# Altium PCB PCB_TUD-EHC-CrankModule_2.pcbdoc
Units mm, origin at the board's own origin, x right, y up, seen from the top; angles counter-clockwise.
Board outline 74.31 x 35.93 mm, 2 copper layers (Top Layer, Bottom Layer); 33 components, 22 nets, 89 pads, 27 vias.
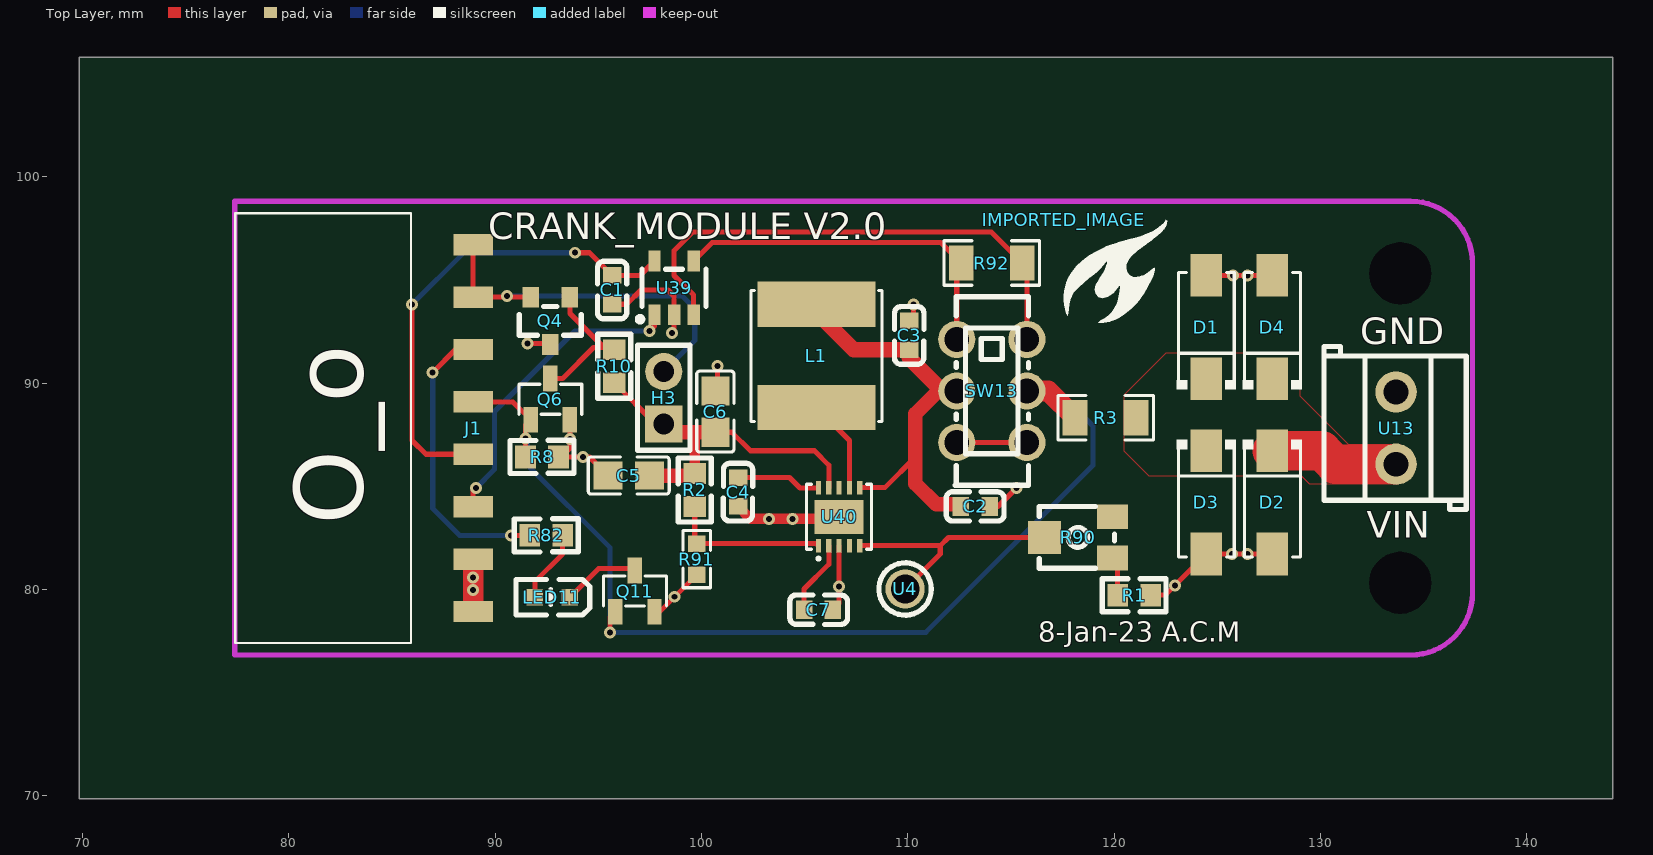
[diagram p0: Top Layer view]
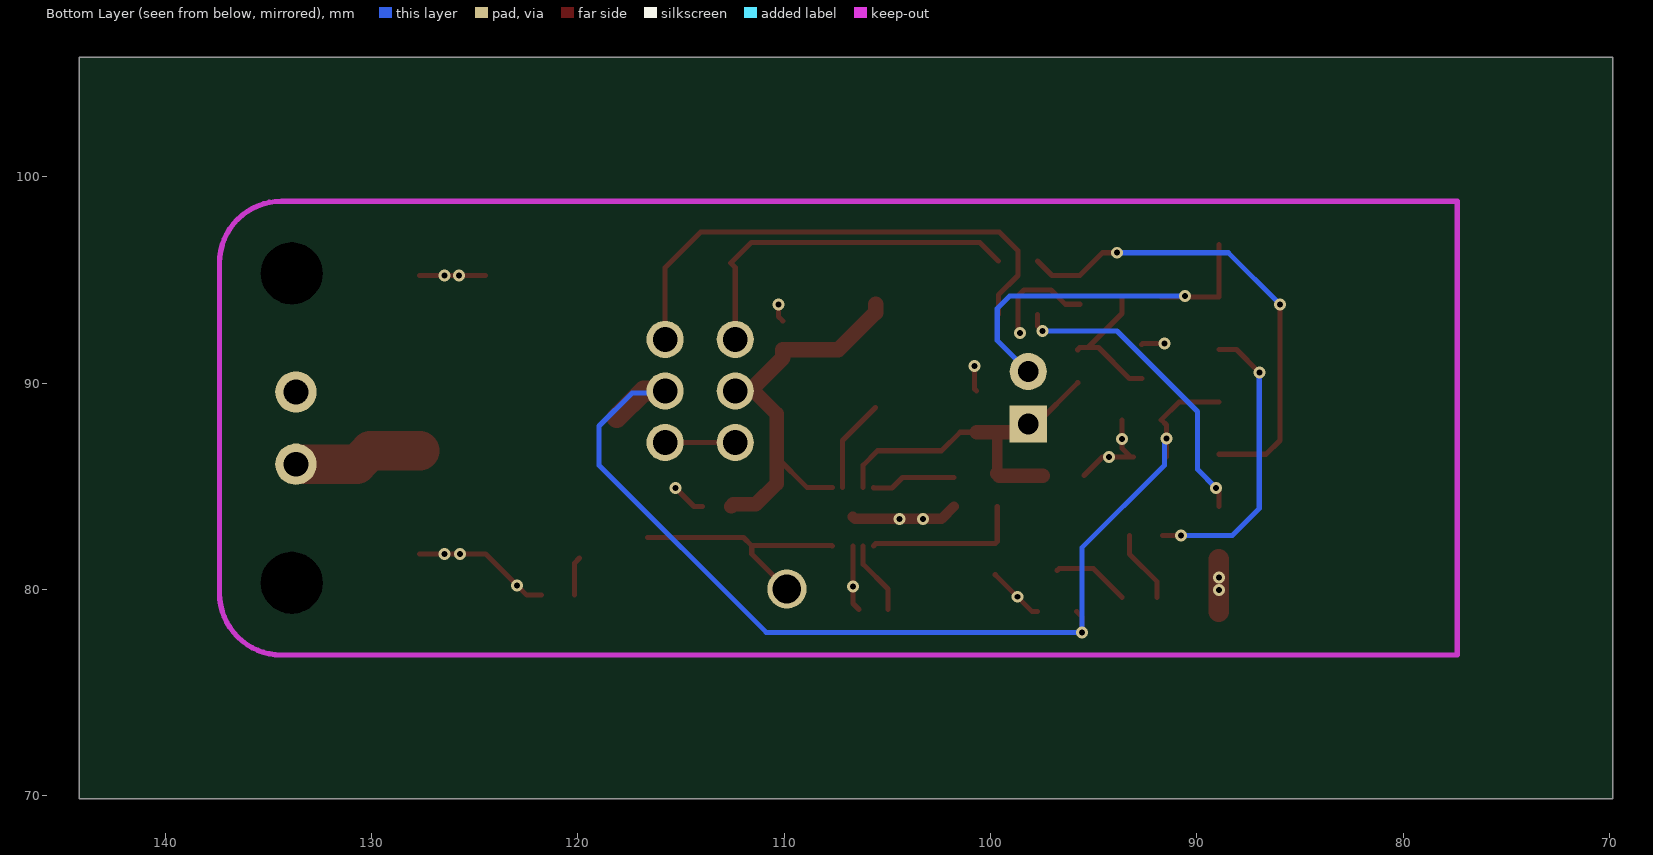
[diagram p1: Bottom Layer view, seen from below]

## Layer stack, top to bottom
Top Layer: signal copper (thickness not stored)
Dielectric: dielectric 0.32, FR-4, Dk 4.8
Bottom Layer: signal copper (thickness not stored)

## Board outline
144.162,69.85 69.85,69.85 69.85,105.78 144.162,105.78
cut-out: 135.373,95.315 ccw(c133.873,95.315) 132.373,95.315 ccw(c133.873,95.315)
cut-out: 135.373,80.315 ccw(c133.873,80.315) 132.373,80.315 ccw(c133.873,80.315)

## Components (designator, comment, footprint, x,y, rotation, side; value= is the part's Value field where it differs from the comment)
C1 "100nF" C0603 95.673,94.515 r90 top
C2 "CL10A106MA8NRNC" C0603 113.273,84.015 r0 top
C3 "CL10A106MA8NRNC" C0603 110.073,92.315 r90 top
C4 "CL10A105KB8NNNC" C0603 101.773,84.715 r90 top
C5 "CL21A226MAQNNNE_C45783" C0805 96.473,85.515 r0 top
C6 "CL21A226MAQNNNE_C45783" C0805 100.673,88.615 r270 top
C7 "CL10A106MA8NRNC" C0603 105.673,79.015 r180 top
D1 "SS54" SMA_L4.4-W2.8-LS5.4-R-RD 124.473,92.715 r90 top
D2 "SS54" SMA_L4.4-W2.8-LS5.4-R-RD 127.673,84.215 r270 top
D3 "SS54" SMA_L4.4-W2.8-LS5.4-R-RD 124.473,84.215 r270 top
D4 "SS54" SMA_L4.4-W2.8-LS5.4-R-RD 127.673,92.715 r90 top
H3 "OUT bypass" HDR-TH_2P-P2.54-V-M-1 98.173,89.285 r90 top
IMPORTED_IMAGE "IMPORTED_IMAGE" IMPORTED_IMAGE 117.573,97.915 r0 top
J1 "SMH-108-02-G-S-TR" SMH-108-02-XX-S-TR 88.93,87.815 r270 top
L1 "CKCS6028-10uH/M" IND-SMD_L6.0-W6.0 105.573,91.315 r90 top
LED11 "KT-0603R" LED0603-R-RD 92.773,79.615 r180 top
Q4 "AO3401A" SOT-23_L2.9-W1.3-P1.90-LS2.4-BR 92.673,93.015 r90 top
Q6 "SI2302" SOT-23-3_L2.9-W1.3-P1.90-LS2.4-BR 92.673,89.215 r270 top
Q11 "AO3400A" SOT-23-3_L2.9-W1.3-P1.90-LS2.4-BR 96.773,79.915 r270 top
R1 "1kΩ" R0603#1 120.973,79.715 r180 top
R2 "3MΩ" R0603#1 99.673,84.815 r270 top
R3 "1206W3F500MT5E_C127691" R1206 119.594,88.315 r180 top
R8 "3MΩ" R0603#1 92.273,86.415 r0 top
R10 "3MΩ" R0603#1 95.773,90.815 r270 top
R82 "1kΩ" R0603#1 92.473,82.615 r180 top
R90 "VG039NCHXTB204" RES-ADJ-SMD_VG039NCH 118.273,82.515 r0 top
R91 "0603WAF7503T5E" R0603#2 99.773,81.462 r90 top
R92 "1206W3F500MT5E_C127691" R1206 114.073,95.815 r0 top
SW13 "K3-2235D-F1" SW-TH_K3-2235D-F1 114.073,89.615 r270 top
U4 "5001" TEST-TH_BD2.54-P1.39 109.873,80.015 r0 top
U13 "KF350-3.5-2P" CONN-TH_P3.50_KF350-3.5-2P 133.673,87.815 r90 top
U39 "INA180A3IDBVR" SOT-23-5_L3.0-W1.7-P0.95-LS2.8-BR 98.673,94.615 r270 top
U40 "LTC3105EDD#PBF" DFN-10_L3.0-W3.0-P0.50-BL-EP_LTC3105EDD 106.673,83.515 r0 top

## Footprints (in the part's own frame and the unit in brackets; to place one, negate y for a bottom-side part, rotate by r counter-clockwise, add the part's x,y. Pads: shape width x height; smd on the part's side, far side on the other; paste and mask are expansions set on the pad)
C0603 [mm]
  rect 0.8x0.9 smd paste+0 mask+0.051: 1(-0.7,0) 2(0.7,0)
  silkscreen extent -1.41,-0.71 1.39,0.72
C0805 [mm]
  rect 1.41x1.35 smd paste-100 mask+0.051: 1(-1,0) 2(1,0)
  silkscreen extent -1.96,-0.9 1.96,0.9
CONN-TH_P3.50_KF350-3.5-2P [mm]
  round 2 hole 1.2 paste+0 mask+0.051: 1(-1.75,0) 2(1.75,0)
  silkscreen extent -3.95,-3.4 3.95,3.5
DFN-10_L3.0-W3.0-P0.50-BL-EP_LTC3105EDD [mm]
  rect 0.25x0.65 smd paste+0 mask+0.051: 1(-1,-1.411) 2(-0.5,-1.411) 3(0,-1.411) 4(0.5,-1.411) 5(1,-1.411) 6(1,1.411) 7(0.5,1.411) 8(0,1.411) 9(-0.5,1.411) 10(-1,1.411)
  rect 2.38x1.65 smd paste+0 mask+0.051: 11(0,0)
  silkscreen extent -1.58,-2.1 1.58,1.58
HDR-TH_2P-P2.54-V-M-1 [mm]
  rect 1.8x1.8 hole 1 paste+0 mask+0.051: 1(-1.27,0)
  round 1.8 hole 1 paste+0 mask+0.051: 2(1.27,0)
  silkscreen extent -2.54,-1.27 2.54,1.27
IMPORTED_IMAGE [mm]
  silkscreen extent 0,-5 5,0
IND-SMD_L6.0-W6.0 [mm]
  rect 2.2x5.72 smd paste+0 mask+0.051: 1(-2.5,0) 2(2.5,0)
  silkscreen extent -3.18,-3.18 3.18,3.18
LED0603-R-RD [mm]
  rect 0.8x0.8 smd paste+0 mask+0.051: 1(0.851,0) 2(-0.851,0)
  silkscreen extent -1.82,-0.86 1.77,0.86
R0603#1 [mm]
  rect 1x1.1 smd paste+0 mask+0.051: 1(-0.8,0) 2(0.8,0)
  silkscreen extent -1.55,-0.8 1.55,0.81
R0603#2 [mm]
  rect 0.806x0.864 smd paste-100 mask+0.051: 1(-0.753,0) 2(0.753,0)
  silkscreen extent -1.39,-0.66 1.39,0.66
R1206 [mm]
  rect 1.208x1.701 smd paste-100 mask+0.051: 1(-1.479,0) 2(1.479,0)
  silkscreen extent -2.31,-1.08 2.31,1.08
RES-ADJ-SMD_VG039NCH [mm]
  rect 1.5x1.2 smd paste+0 mask+0.051: 1(1.65,-1) 3(1.65,1)
  rect 1.6x1.6 smd paste+0 mask+0.051: 2(-1.65,0)
  silkscreen extent -1.9,-1.5 1.75,1.5
SMA_L4.4-W2.8-LS5.4-R-RD [mm]
  rect 2.063x1.539 smd paste+0 mask+0.051: 1(2.504,0) 2(-2.504,0)
  silkscreen extent -3.03,-1.43 2.65,1.43
SMH-108-02-XX-S-TR [mm]
  rect 1.04x1.91 smd paste+0 mask+0.051: 1(-8.89,0) 2(-6.35,0) 3(-3.81,0) 4(-1.27,0) 5(1.27,0) 6(3.81,0) 7(6.35,0) 8(8.89,0)
  silkscreen extent -10.42,-11.53 10.42,-3.02
SOT-23-3_L2.9-W1.3-P1.90-LS2.4-BR [mm]
  rect 1.25x0.7 smd paste+0 mask+0.051: 1(1,-0.95) 2(1,0.95) 3(-1,0)
  silkscreen extent -0.73,-1.53 0.73,1.53
SOT-23-5_L3.0-W1.7-P0.95-LS2.8-BR [mm]
  rect 1x0.6 smd paste+0 mask+0.051: 1(1.3,-0.95) 2(1.3,0) 3(1.3,0.95) 4(-1.3,0.95) 5(-1.3,-0.95)
  silkscreen extent -0.9,-1.78 1.65,1.55
SOT-23_L2.9-W1.3-P1.90-LS2.4-BR [mm]
  rect 1x0.8 smd paste+0 mask+0.051: 1(1.15,-0.95) 2(1.15,0.95) 3(-1.15,0)
  silkscreen extent -0.7,-1.5 0.7,1.5
SW-TH_K3-2235D-F1 [mm]
  round 1.8 hole 1.2 paste+0 mask+0.051: 1(-2.5,1.7) 2(0,1.7) 3(2.5,1.7) 4(-2.5,-1.7) 5(0,-1.7) 6(2.5,-1.7)
  silkscreen extent -4.57,-1.78 4.57,1.78
TEST-TH_BD2.54-P1.39 [mm]
  round 1.9 hole 1.39 paste+0 mask+0.051: 1(0,0)
  silkscreen extent -1.27,-1.27 1.27,1.27

## Via types
v1: diameter 0.58, hole 0.29, Top Layer to Bottom Layer, 27 vias

## Nets (pads, with @x,y where several pads share a name; then routed paths per layer and width w, separated by ;. In a path a pad name is that pad's centre, name@x,y a point inside that pad or via, vN(x,y) a via of type N, cw(c..) or ccw(c..) an arc to the next point about the centre after c; other vN are vias at no path point)
#CRANK_STOR_RDY: Q4.1 Q6.3 R10.1 | length 6.9
  Top Layer w0.248: Q6.3 93.273,90.215 94.773,91.715 R10.1@95.273,91.715 ; Q4.1 93.623,93.365 R10.1@95.273,91.715 ; R10.1 95.673,91.715 R10.1@95.273,91.715
$1N8877: LED11.2 Q11.3 | length 3.8
  Top Layer w0.248: LED11.2 95.024,81.015 96.673,81.015 Q11.3
$1N8878: LED11.1 R82.1 | length 3.6
  Top Layer w0.248: LED11.1 91.922,80.364 93.273,81.715 R82.1
$1N13552: R92.1 SW13.4 U39.4 | length 17.5
  Top Layer w0.248: U39.4 100.523,96.815 111.594,96.815 R92.1 112.373,95.594 SW13.4
$1N13553: R92.2 SW13.1 U39.3 | length 25.2
  Top Layer w0.248: U39.3 99.623,94.265 98.673,95.215 98.673,96.415 99.573,97.315 114.052,97.315 R92.2 115.773,95.594 SW13.1
$1N13554: SW13.3 SW13.6 | length 3.4
  Top Layer w0.248: SW13.6 SW13.3
$1N18080: D1.2 D2.2 D3.2 D4.2 R3.1 U13.1 | length 6.3
  Top Layer w1.9: D2.2 130.069,86.719 130.723,86.065 U13.1
$1N23327: L1.1 U40.7 | length 4.6
  Top Layer w0.248: L1.1 107.173,87.215 U40.7
$1N23686: C4.2 U40.10 | length 4.1
  Top Layer w0.248: C4.2 104.273,85.415 104.773,84.915 105.661,84.915 U40.10
$1N24436: C7.2 U40.2 | length 3.6
  Top Layer w0.248: C7.2 104.973,80.015 106.173,81.215 U40.2
$1N24842: R90.2 U4.1 U40.5 | length 11.9
  Top Layer w0.248: U40.5 107.684,82.115 111.573,82.115 ; U4.1 111.573,81.715 111.573,82.115 ; R90.2 111.973,82.515 111.573,82.115
$1N24929: R1.2 R90.1 | length 1.9
  Top Layer w0.248: R90.1 120.173,81.265 R1.2
$1N25297: R2.2 R91.2 U40.1 | length 7.8
  Top Layer w0.248: R2.2 99.673,82.315 R91.2 105.561,82.215 U40.1
CONN_IN: J1.4 Q6.1 Q11.1 R3.2 R8.1 SW13.2 | length 52.7
  Top Layer w0.248: J1.4 90.853,89.085 Q6.1 91.473,87.965 v1(91.473,87.315) R8.1 ; v1(95.573,77.915) 95.573,78.665 Q11.1
  Top Layer w1: SW13.2 116.815,89.615 R3.2
  Bottom Layer w0.248: v1(91.473,87.315) 91.573,87.215 91.573,86.015 95.573,82.015 v1(95.573,77.915) 110.873,77.915 118.973,86.015 118.973,87.915 117.373,89.515 115.873,89.515 SW13.2
CRANK_STOR: C5.2 C6.2 H3.1 Q4.3 R2.1 R10.2 U40.9 | length 26.8
  Top Layer w0.248: v1(91.573,91.915) 92.623,91.915 Q4.3 ; R10.2 97.773,88.015 H3.1 ; C6.2 101.473,87.615 102.373,86.715 105.473,86.715 106.173,86.015 U40.9
  Top Layer w0.5: 99.545,87.615 99.673,87.487 R2.1
  Top Layer w0.7: C5.2 99.573,85.515 R2.1 ; H3.1 98.573,87.615 99.545,87.615 C6.2
  V+ w1: v1(91.573,91.915) 92.987,91.915 96.887,88.015 H3.1
CURR_SENSE: J1.6 U39.1 | length 15.1
  Top Layer w0.248: J1.6 88.93,84.772 v1(89.073,84.915) ; v1(97.473,92.515) 97.723,92.765 U39.1
  Bottom Layer w0.248: v1(89.073,84.915) 89.973,85.815 89.973,88.615 93.873,92.515 v1(97.473,92.515)
DEBUG_5V: J1.3 R82.2 | length 14.3
  Top Layer w0.248: v1(86.973,90.515) 88.083,91.625 J1.3 ; v1(90.773,82.615) R82.2
  Bottom Layer w0.248: v1(86.973,90.515) 86.973,83.915 88.273,82.615 v1(90.773,82.615)
GND: C1.1 C2.2 C3.2 C4.1 C5.1 C6.1 C7.1 D1.1 D2.1 D3.1 D4.1 J1.7 J1.8 Q6.2 Q11.2 R1.1 R8.2 R91.1 U13.2 U39.2 U40.3 U40.11 | length 37.5
  Top Layer w0.248: R8.2 R8.2@93.201,86.415 ; Q6.2 v1(93.623,87.295) 93.623,86.837 R8.2@93.201,86.415 ; C5.1 94.573,86.415 v1(94.248,86.415) R8.2@93.201,86.415 ; C1.1 96.373,93.815 97.073,94.515 98.373,94.515 98.673,94.215 U39.2 98.673,92.515 v1(98.573,92.415) ; Q11.2 97.98,78.915 v1(98.704,79.639) R91.1 ; C6.1 100.773,89.715 v1(100.773,90.815) ; C7.1 106.673,79.315 v1(106.673,80.125) U40.3 ; C3.2 110.273,93.215 v1(110.273,93.815) ; C2.2 114.373,84.015 v1(115.273,84.915) ; R1.1 122.477,79.715 v1(122.953,80.192) D3.1 v1(125.711,81.711) v1(126.469,81.711) D2.1 ; D1.1 v1(125.776,95.219) v1(126.479,95.219) D4.1
  Top Layer w0.5: C4.1 102.373,83.415 v1(103.276,83.415) v1(104.41,83.415) 106.573,83.415 U40.11
  Top Layer w1: J1.8 v1(88.93,79.96) v1(88.93,80.576) J1.7
MAIN_STOR: H3.2 J1.1 J1.2 Q4.2 | length 18.4
  Top Layer w0.248: J1.1 J1.2 v1@90.584,94.165 ; v1(90.573,94.215) 90.573,94.176 v1@90.584,94.165 ; Q4.2 v1@90.584,94.165
  Bottom Layer w0.248: v1(90.573,94.215) 99.073,94.215 99.673,93.615 99.673,92.055 H3.2
PWR_IN: C2.1 C3.1 L1.2 SW13.5 U40.6 | length 20.2
  Top Layer w0.248: U40.6 108.884,84.926 110.373,86.415
  Top Layer w0.7: SW13.5@111.673,89.615 111.473,89.615 110.373,88.515 110.373,86.415 110.373,85.115 111.373,84.115 112.473,84.115 C2.1
  Top Layer w0.75: L1.2 105.573,93.415 107.373,91.615 C3.1 110.073,91.215 111.673,89.615 111.773,89.515 112.273,89.515 SW13.5
V_SENSING: C1.2 J1.5 U39.5 | length 23.4
  Top Layer w0.248: v1(85.973,93.815) 85.973,87.215 86.643,86.545 J1.5 ; v1(93.873,96.315) 94.573,96.315 C1.2 97.023,95.215 U39.5
  Bottom Layer w0.248: v1(85.973,93.815) 88.473,96.315 v1(93.873,96.315)
"": R90.3 U40.4 U40.8

## Polygon pours and split planes (outlines as drawn)
GND on GND (split plane): 137.222,79.815 cw(c135.792,78.397) 134.376,76.965 ccw(c134.374,76.95) 134.373,76.966 80.474,76.966 77.524,76.966 77.524,98.664 134.371,98.664 134.373,98.664 cw(c135.798,97.24) 137.222,95.815 137.222,79.819 ccw(c137.236,79.817)
GND on GND (split plane): 133.17,88.306 133.17,89.565 134.175,89.565 134.175,88.306
GND on GND (split plane): 134.175,90.824 134.175,89.565 133.17,89.565 133.17,90.824
GND on GND (split plane): 132.414,90.067 133.673,90.067 133.673,89.062 132.414,89.062
GND on GND (split plane): 133.673,90.067 134.932,90.067 134.932,89.062 133.673,89.062
$1N18080 on Top Layer (solid, remove dead copper, pour order 0): 133.873,87.015 131.373,87.015 129.029,89.359 129.029,91.446 122.504,91.446 120.473,89.415 120.473,86.715 121.673,85.515 129.073,85.515 129.473,85.115 133.773,85.115

## Keep-outs
Board Outline Layer:
  lines w0.254 net "": 77.373,76.816 80.474,76.815 134.373,76.815 ; 77.373,76.815 77.373,98.815 134.371,98.815 ; 134.373,98.815 cw(c134.373,95.815) 137.373,95.815 137.373,79.815 ; 134.373,76.815 ccw(c134.373,79.815) 137.373,79.815 ; 134.373,76.815 ccw(c134.373,79.815) 137.373,79.815

## Silkscreen, mask and mechanical layers (free items; w line width, h text height)
Top Silkscreen Layer:
  text "CRANK_MODULE V2.0" at 89.664,96.959 h1.3
  text "GND" at 131.938,91.888 h1.29
  text "O_o" at 83.584,83.125 h3.35 r90
  text "VIN" at 132.238,82.488 h1.29
  text "8-Jan-23 A.C.M" at 116.32,77.448 h0.97
Mechanical Layer:
  circle w0.025 net "": c133.873,95.315 r1.5
  circle w0.025 net "": c133.873,80.315 r1.5